# EAGLE board OPA_BOARD_V2 (EAGLE 7.5.0)

Size 63.5 x 53 mm. Coordinates in mm from the lower left corner, seen from the top.
Outline: 0,0 63.5,0 63.5,26 36.25,26 36.25,40 63.5,40 63.5,53 0,53 0,40 27.25,40 27.25,26 0,26 0,0
Outline: 14,8.5 49,8.5 49,17.5 14,17.5 14,8.5
Copper layers (1*16): Top 0.035mm / dielectric 1.5mm / Bottom 0.035mm
Design rules "default": minimum track width 10mil, minimum drill 24mil, track to track 8mil, track to pad 8mil, pad to pad 8mil, via to via 8mil, smd to smd 8mil, copper to edge 40mil, drill to drill 8mil, minimum pad ring 10mil, minimum via ring 8mil, stop-mask expansion 4mil, vias tented up to drill 0mil, thermal gap 10mil

## Footprints (pad centres in the part's own frame; a part is rotated, then mirrored left to right if it is on the bottom)
CAP1206 = smd 0.914 x 1.803: 1 -1.397,0; 2 1.397,0
SOIC8 = smd 0.6 x 2.2: 1 -1.905,-2.6; 2 -0.635,-2.6; 3 0.635,-2.6; 4 1.905,-2.6; 5 1.905,2.6; 6 0.635,2.6; 7 -0.635,2.6; 8 -1.905,2.6
RES1206 = smd 1.118 x 1.753: 1 -1.473,0; 2 1.473,0
PANELPADS = smd 2.032 x 1.524: P$1 1.956,0.69; P$2 13.3,0.69
5X2RIBBONCONNECTOR = drill 0.8 square: 1--12V -5.08,-1.27 | drill 0.8: 2-5V -2.54,-1.27; 3-SCLK 0,-1.27; 4-MISO 2.54,-1.27; 5-CS 5.08,-1.27; 6-GND 5.08,1.27; 7-MOSI 2.54,1.27; 8-GND 0,1.27; 9-GND -2.54,1.27; 10-+12V -5.08,1.27
SOIC16N = smd 0.6 x 2.2: 1 -4.445,-2.6; 2 -3.175,-2.6; 3 -1.905,-2.6; 4 -0.635,-2.6; 5 0.635,-2.6; 6 1.905,-2.6; 7 3.175,-2.6; 8 4.445,-2.6; 9 4.445,2.6; 10 3.175,2.6; 11 1.905,2.6; 12 0.635,2.6; 13 -0.635,2.6; 14 -1.905,2.6; 15 -3.175,2.6; 16 -4.445,2.6

## Placement (x,y rotation side)
C1  10nF  [CAP1206]  -25.4,17.78 0 top  (outside the outline)
C2  10nF  [CAP1206]  -30.48,17.78 0 top  (outside the outline)
C3  10nF  [CAP1206]  -15.24,17.78 0 top  (outside the outline)
C4  10nF  [CAP1206]  -20.32,17.78 0 top  (outside the outline)
C5  1UF  [CAP1206]  -41,-6 0 top  (outside the outline)
OPA1  [SOIC8]  -22.86,3.81 0 top  (outside the outline)
OPA2  [SOIC8]  -30.48,3.81 0 top  (outside the outline)
OPA3  [SOIC8]  -15.24,3.81 0 top  (outside the outline)
OPA4  [SOIC8]  -15.24,11.43 0 top  (outside the outline)
R1  10K Ohms  [RES1206]  -36.83,17.78 0 top  (outside the outline)
R2  10K Ohms  [RES1206]  -16.51,22.86 0 top  (outside the outline)
R3  10K Ohms  [RES1206]  -22.86,22.86 0 top  (outside the outline)
R4  10K Ohms  [RES1206]  -29.21,22.86 0 top  (outside the outline)
SP1  PANELPAD  [PANELPADS]  -27.94,30.48 0 top  (outside the outline)
SP2  PANELPAD  [PANELPADS]  -27.94,34.29 0 top  (outside the outline)
SP3  PANELPAD  [PANELPADS]  -27.94,26.67 0 top  (outside the outline)
SP4  PANELPAD  [PANELPADS]  -27.94,38.1 0 top  (outside the outline)
U$1  5X2RIBBONCONNECTOR  [5X2RIBBONCONNECTOR]  47,47 0 top
U$2  MCP3008-SOIC16  [SOIC16N]  27.5,47.5 0 top

## Library data of the parts
C1-C5 = RSC-16; MPN: C1206C103K5RACTU; OC_FARNELL: 1414713; OC_NEWARK: 61H7741; SUPPLIER: Kemet; TOLERANCE: ±10%; VOLTAGERATING: 50V
OPA1-OPA4 SP1-SP4 U$1 U$2 = RSC-16
R1-R4 = RSC-16; MPN: CRCW120610K0FKEA; OC_FARNELL: 1469970; OC_NEWARK: 53K1907; SUPPLIER: Vishay; TOLERANCE: ±1%; WATTAGE: 0.25W

## Nets
5V: C5.2 U$1.2-5V U$2.15 U$2.16
+12V: OPA1.7 OPA2.7 OPA3.7 OPA4.7 U$1.10-+12V
-12V: OPA1.4 OPA2.4 OPA3.4 OPA4.4 U$1.1--12V
CH1: C1.2 OPA1.6 R1.1
CH2: C2.2 OPA2.6 R2.1
CH3: C3.2 OPA3.6 R3.1
CH4: C4.2 OPA4.6 R4.1
CS: U$1.5-CS U$2.10
GND: C5.1 U$1.6-GND U$1.8-GND U$1.9-GND U$2.9 U$2.14
MISO: U$1.4-MISO U$2.12
MOSI: U$1.7-MOSI U$2.11
N$1: C3.1 R3.2
N$4: C4.1 R4.2
N$6: C2.1 R2.2
N$9: C1.1 R1.2
SCLK: U$1.3-SCLK U$2.13

## Tracks (layer width: path | path; a pad name or v marks a point on that pad's centre or on a via)
5V  (3 unrouted)
+12V  (4 unrouted)
-12V  (4 unrouted)
CH1  (2 unrouted)
CH2  (2 unrouted)
CH3  (2 unrouted)
CH4  (2 unrouted)
CS  (1 unrouted)
GND  (5 unrouted)
MISO  (1 unrouted)
MOSI  (1 unrouted)
N$1  (1 unrouted)
N$4  (1 unrouted)
N$6  (1 unrouted)
N$9  (1 unrouted)
SCLK  (1 unrouted)